# Altium PCB Flight Controller.PcbDoc
Units mm, origin at the board's own origin, x right, y up, seen from the top; angles counter-clockwise.
Board outline 55 x 55 mm, 4 copper layers (Top Layer, GND, PWR, Bottom Layer), stack 1.569 mm thick; 67 components, 56 nets, 288 pads, 159 vias.
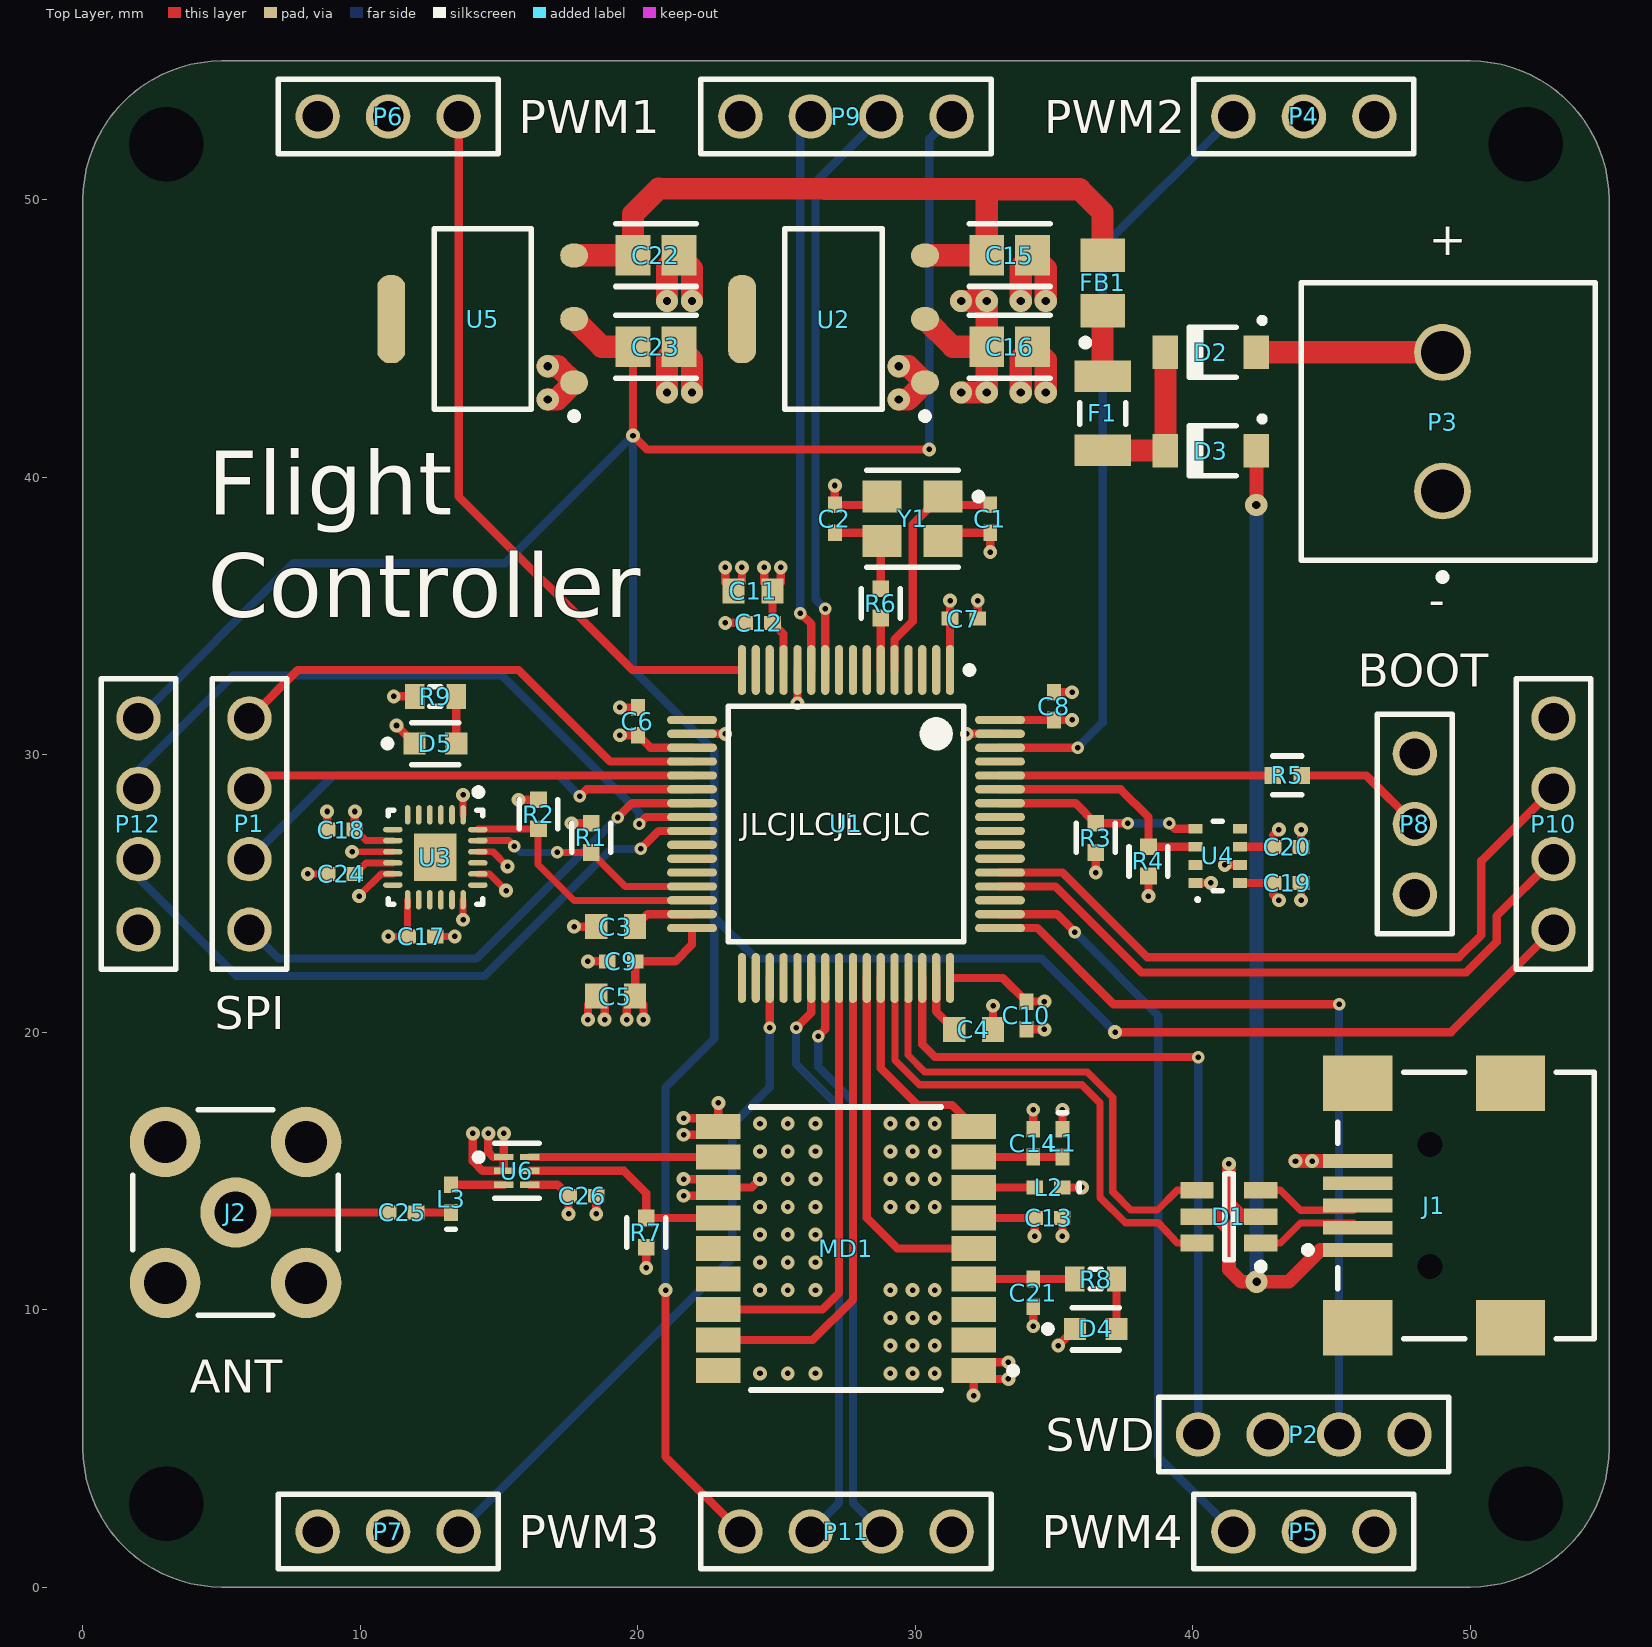
[diagram p0: Top Layer view]
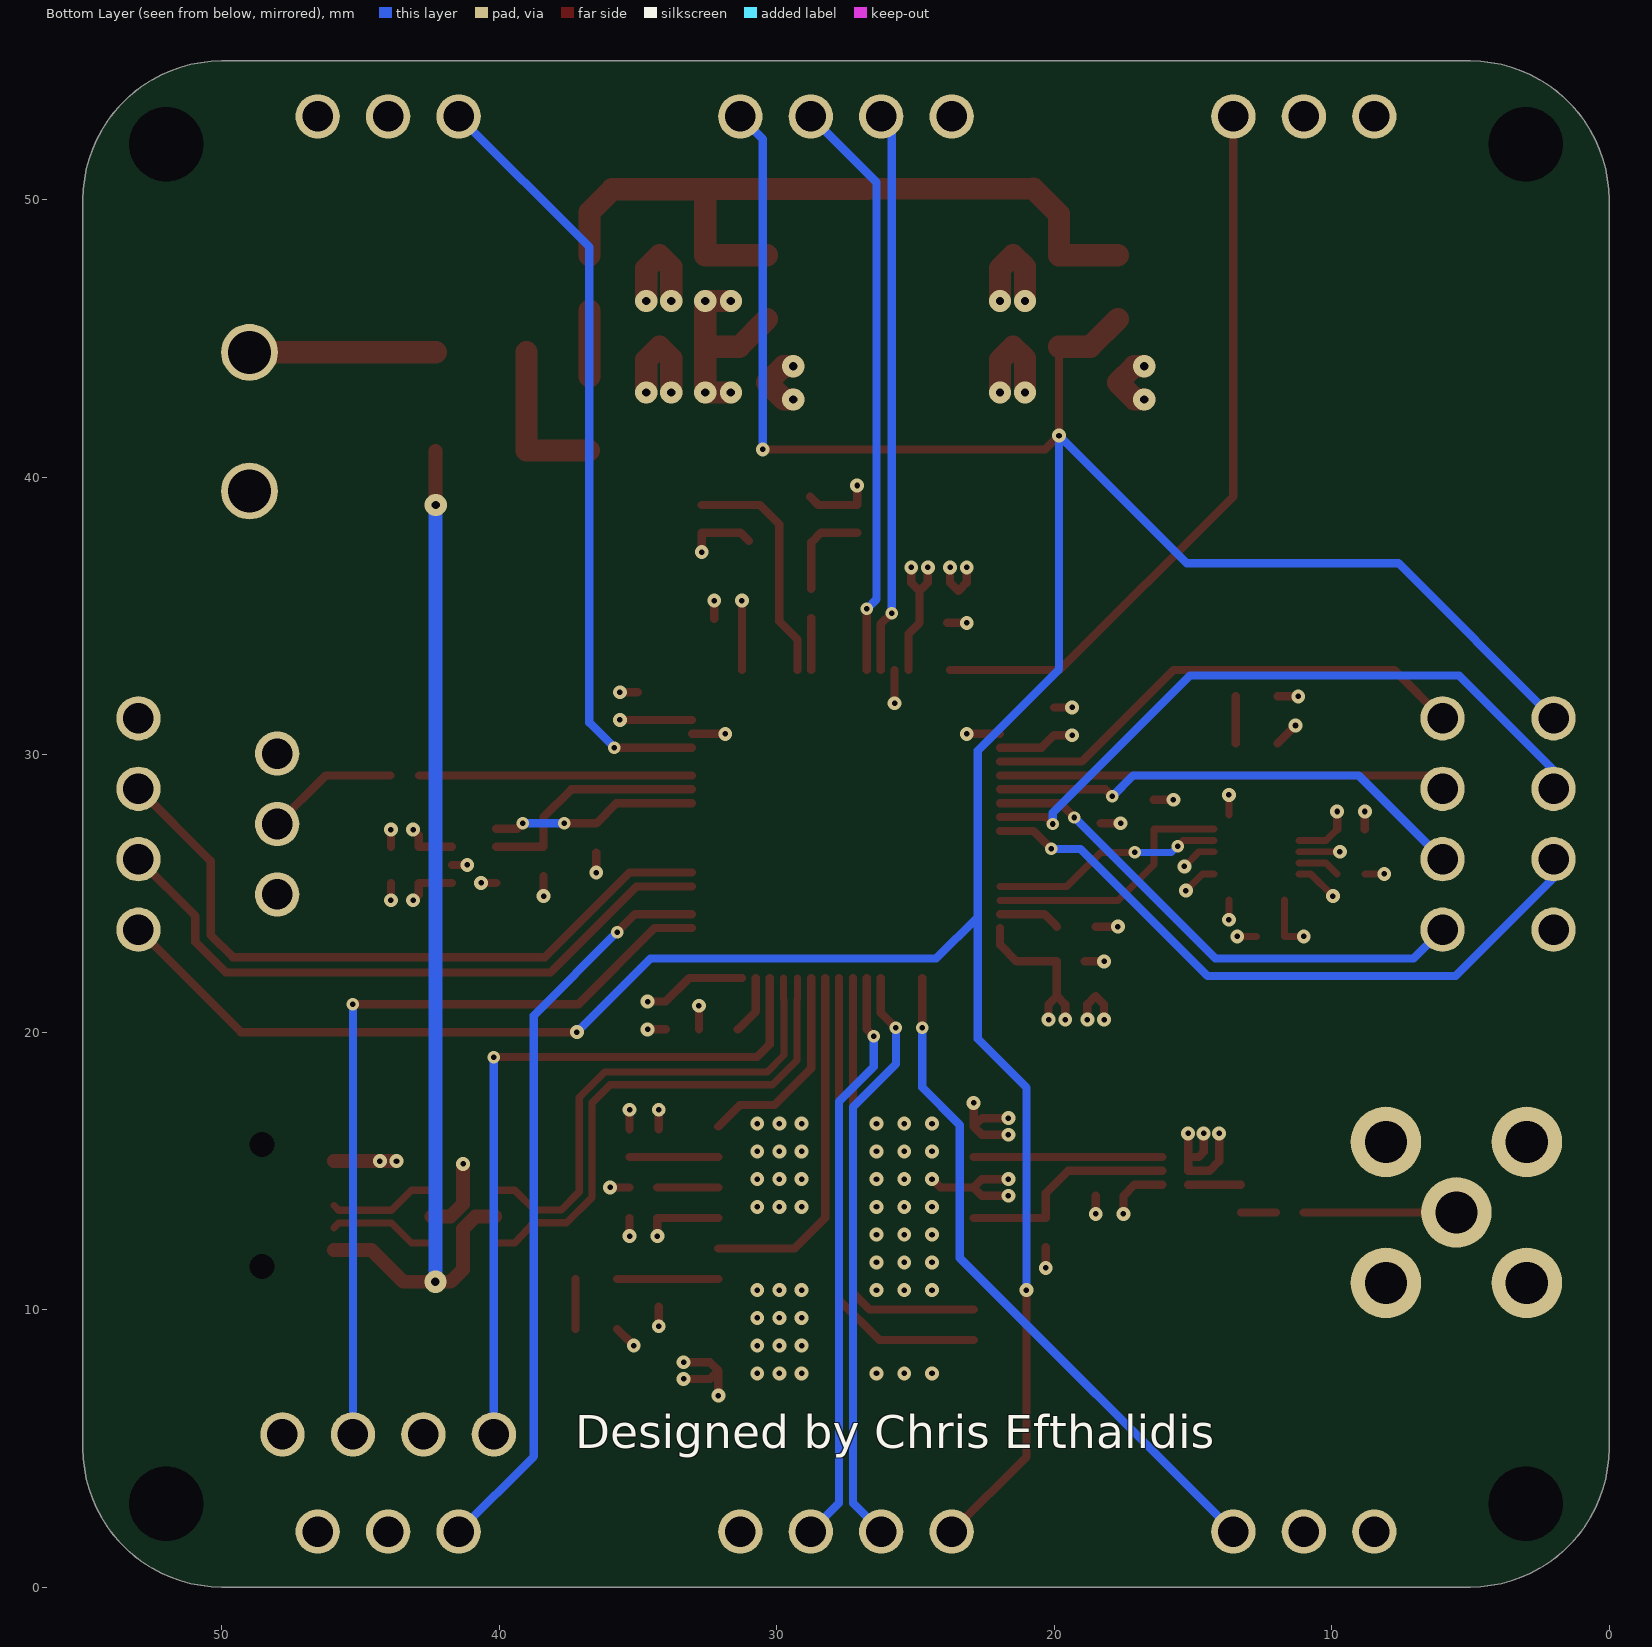
[diagram p1: Bottom Layer view, seen from below]
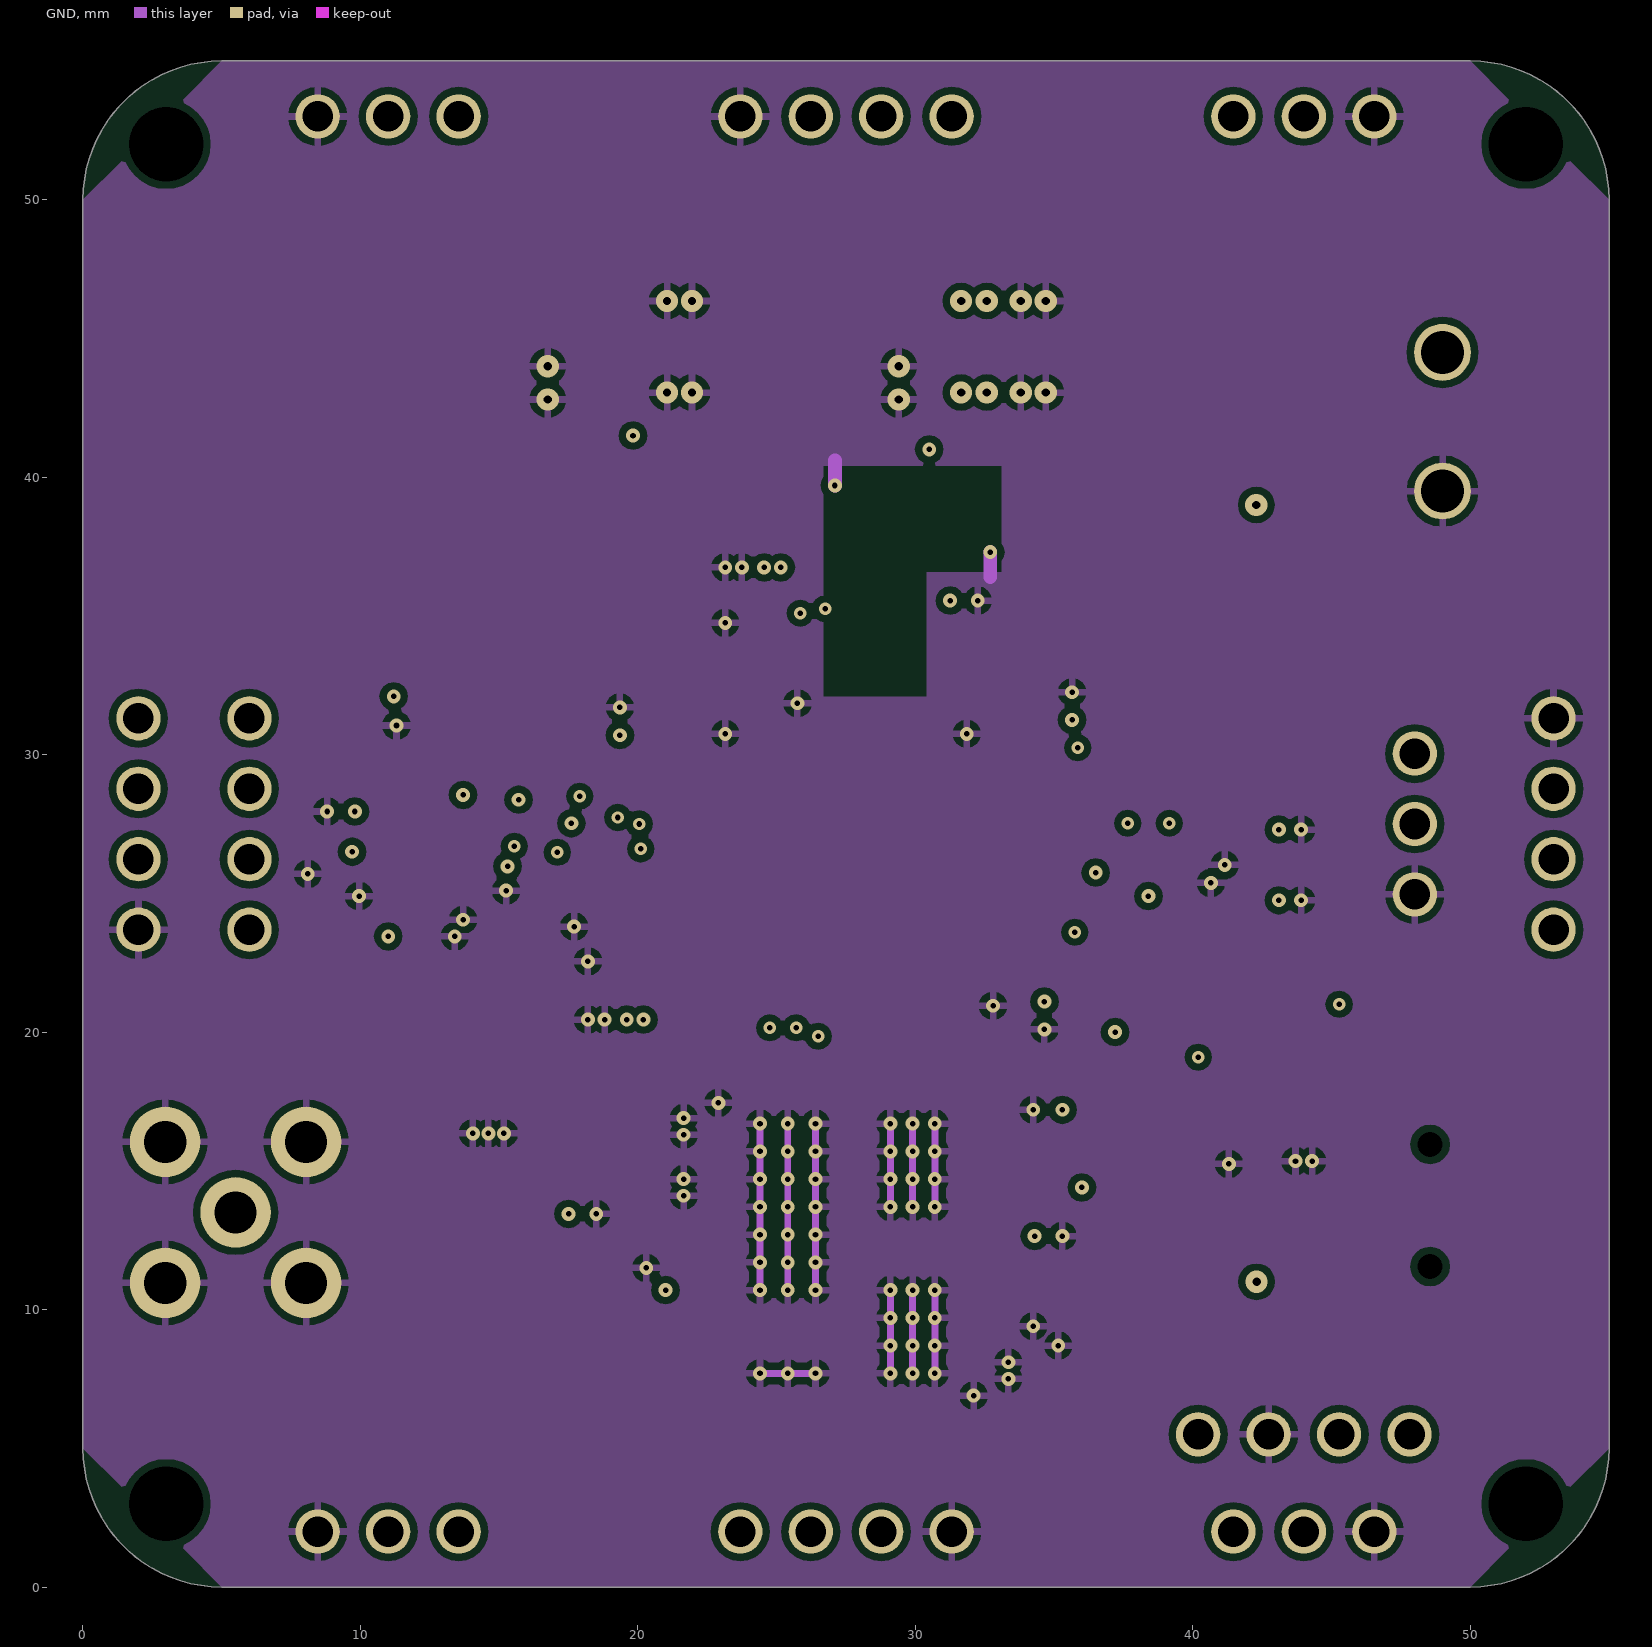
[diagram p2: GND]
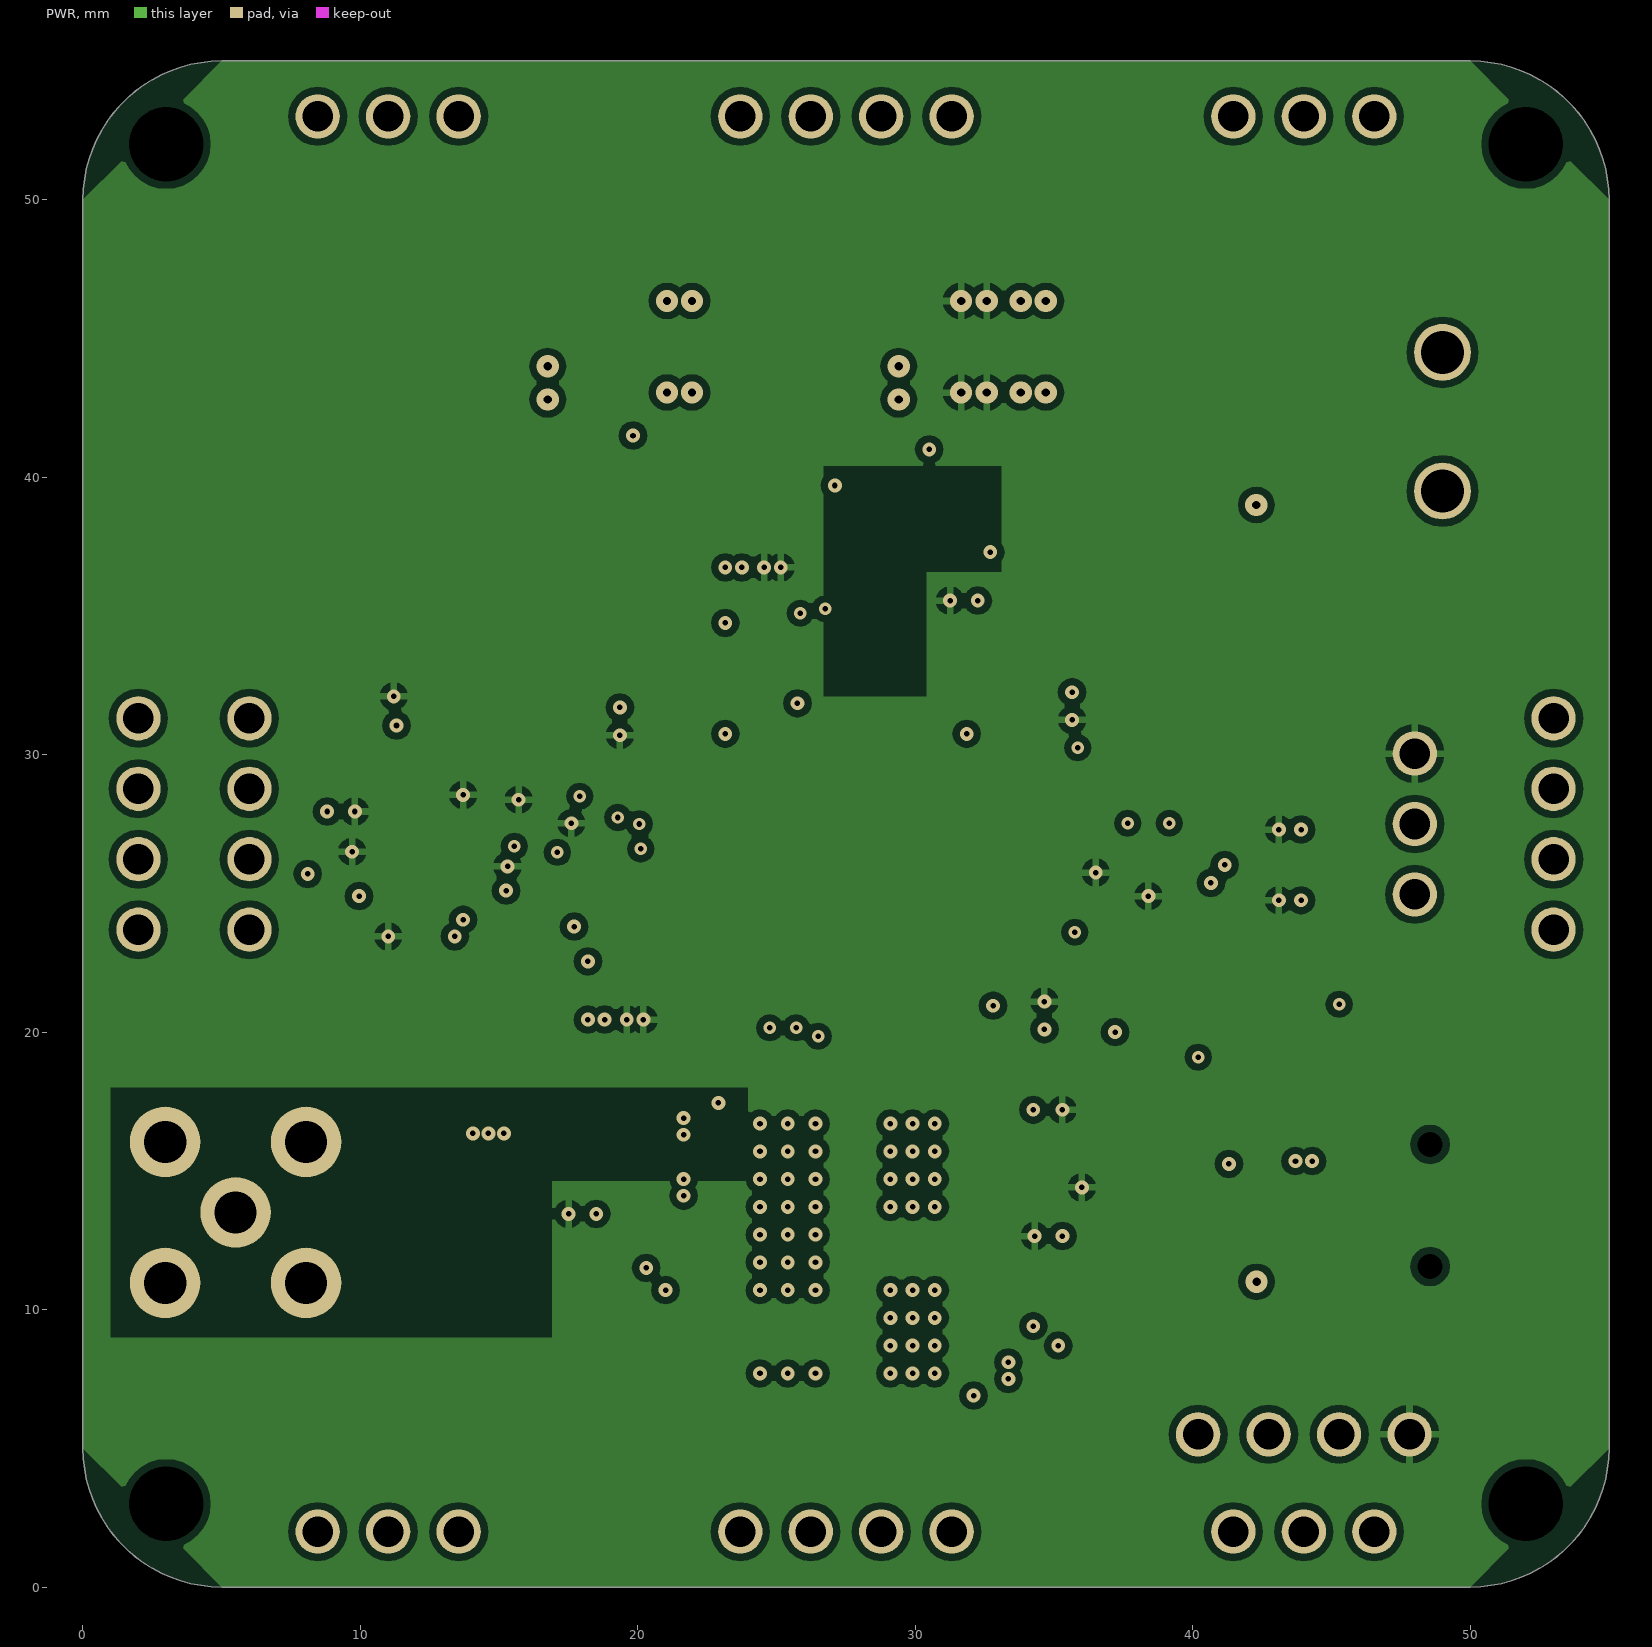
[diagram p3: PWR]

## Layer stack, top to bottom
Top Solder: solder mask 0.01, SM-001, Dk 3.8
Top Layer: signal copper 0.035
Dielectric 1: prepreg 0.2, PP-017, Dk 4.6
GND: signal copper 0.017
Dielectric 3: core 1.065, Core-039, Dk 4.8
PWR: signal copper 0.017
Dielectric 2: prepreg 0.2, PP-017, Dk 4.6
Bottom Layer: signal copper 0.035
Bottom Solder: solder mask 0.01, SM-001, Dk 3.8

## Board outline
0,5 0,50 cw(c5,50) 5,55 50,55 cw(c50,50) 55,50 55,5 cw(c50,5) 50,0 5,0 cw(c5,5)

## Design rules (kind name [scope] priority, off if disabled: settings)
Clearance [All] p1: gap=0.254 ignorepadtopadclearanceinfootprint=FALSE except(0: Arc-Hole Track-Hole; 0.1: Arc-Arc Arc-Track Track-Track; 0.127: SMDPad-SMDPad; 0.15: Arc-SMDPad Track-SMDPad; 0.2: THPad-THPad; 0.33: Arc-THPad Track-THPad)
DiffPairsRouting USB [InDifferentialPairClass('All Differential Pairs')] p1: maxlimit=0.203 minlimit=0.203 mostfreqgap=0.203 toplayer_minwidth=0.261 toplayer_maxwidth=0.261 toplayer_prefwidth=0.261 midlayer1_minwidth=0.261 midlayer1_maxwidth=0.261 midlayer1_prefwidth=0.261 midlayer2_minwidth=0.261 midlayer2_maxwidth=0.261 midlayer2_prefwidth=0.261 bottomlayer_minwidth=0.261 bottomlayer_maxwidth=0.261 bottomlayer_prefwidth=0.261 maxuncoupledlength=15
HoleSize [All] p1: absolutevalues=TRUE maxlimit=6.3 minlimit=0.2 maxpercent=80.000 minpercent=20.000
HoleToHoleClearance [All] p1: gap=0.1 allowstackedmicrovias=TRUE
MinimumSolderMaskSliver [All] p1: minsoldermaskwidth=0.1
PolygonConnect [All] p1: connectstyle=Relief reliefconductorwidth=0.254 reliefentries=4 polygonreliefangle="90 Angle" airgapwidth=0.254
RoutingVias [All] p1: holewidth=0.711 width=1.27 viastyle="Through Hole" minholewidth=0.2 minwidth=0.45 maxholewidth=0.711 maxwidth=1.27
SilkToSilkClearance [All] p1: silktosilkclearance=0.2
SilkToSolderMaskClearance [IsPad] p1: minsilkscreentomaskgap=0.1 clearancetoexposedcopper=TRUE
SolderMaskExpansion [All] p1: expansion=0.05
Width [All] p1: maxlimit=1 minlimit=0.1 preferedwidth=0.25 checkconnectedcopper=TRUE
24 further rules are at their usual default settings.

## Classes and differential pairs
differential pair USB: +USB_P -USB_N
differential pair USB_CONN: +USB_CONN_P -USB_CONN_N

## Components (designator, comment, footprint, x,y, rotation, side; value= is the part's Value field where it differs from the comment)
C1 "Cap Semi" 0402 32.7,38.5 r270 top value=12p
C2 "Cap Semi" 0402 27.1,38.5 r90 top value=12p
C3 "Cap Semi" 1608[0603] 19.2,23.8 r0 top value=2u2
C4 "Cap Semi" 1608[0603] 32.1,20.1 r180 top value=2u2
C5 "Cap Semi" 1608[0603] 19.2,21.3 r0 top value=4u7
C6 "Cap Semi" 0402 20,31.2 r270 top value=100n
C7 "Cap Semi" 0402 31.75,34.9 r180 top value=100n
C8 "Cap Semi" 0402 35,31.75 r270 top value=100n
C9 "Cap Semi" 0402 19.4,22.55 r0 top value=100n
C10 "Cap Semi" 0402 34,20.6 r90 top value=100n
C11 "Cap Semi" 1608[0603] 24.15,35.9 r0 top value=1u
C12 "Cap Semi" 0402 24.35,34.75 r0 top value=100n
C13 "Cap Semi" 0402 34.8,13.3 r0 top value=10n
C14 "Cap Semi" 0402 34.25,16 r270 top value=56p
C15 "10u" FP-CL21-IPC_B 33.4,48 r0 top
C16 "10u" FP-CL21-IPC_B 33.4,44.7 r0 top
C17 "Cap Semi" 0402 12.2,23.45 r180 top value=100n
C18 "Cap Semi" 0402 9.3,27.3 r0 top value=10n
C19 "Cap Semi" 0402 43.4,25.375 r0 top value=100n
C20 "Cap Semi" 0402 43.4,26.675 r0 top value=100n
C21 "Cap Semi" 0402 34.25,10.6 r270 top value=56p
C22 "10u" FP-CL21-IPC_B 20.65,48 r0 top
C23 "10u" FP-CL21-IPC_B 20.65,44.7 r0 top
C24 "Cap Semi" 0402 9.3,25.7 r0 top value=100n
C25 "Cap Semi" 0402 11.5,13.5 r0 top value=470p
C26 "Cap Semi" 0402 18,14.1 r0 top value=33n
D1 "USBLC6-2SC6" STM-SOT23-6L_V 41.3,13.35 r180 top
D2 "B5819W" MCC-SOD123_V 40.65,44.5 r180 top
D3 "B5819W" MCC-SOD123_V 40.65,40.95 r180 top
D4 "597-3901-831F" FP-597-MFG 36.5,9.3 r0 top
D5 "597-3901-831F" FP-597-MFG 12.7,30.4 r0 top
F1 "nSMD050-24V" FP-0466-MFG 36.75,42.3 r90 top value=0.075Ù
FB1 "GZ2012D601TF" SNLD-CHIP2-2012X105_V 36.75,47 r90 top
J1 "65100516121" WE-65100516121_V 48.7,13.75 r90 top
J2 "CONSMA001" CON-SMA 5.5,13.5 r90 top
L1 "Inductor" 0402-A 35.3,16 r270 top value=27n
L2 "Inductor" 0402-A 34.8,14.4 r180 top value=27n
L3 "Inductor" 0402-A 13.27,14 r90 top value=6n8
MD1 "TESEO-LIV3F" FP-LCC-18-MFG 27.5,12.2 r180 top
P1 "Header 4" 61300411121 6,27.5 r90 top
P2 "Header 4" 61300411121 44,5.5 r0 top
P3 "SCREW-5.0/5.08 2WAYS" SCREW-5.0-2WAYS_V 49,42 r90 top
P4 "Header 3" 61300311121 44,53 r0 top
P5 "Header 3" 61300311121 44,2 r0 top
P6 "Header 3" 61300311121 11,53 r180 top
P7 "Header 3" 61300311121 11,2 r180 top
P8 "Header 3" 61300311121 48,27.5 r270 top
P9 "Header 4" 61300411121 27.5,53 r0 top
P10 "Header 4" 61300411121 53,27.5 r270 top
P11 "Header 4" 61300411121 27.5,2 r180 top
P12 "Header 4" 61300411121 2,27.5 r90 top
R1 "10K" FP-CRCW0402-e3-MFG 18.318,27 r90 top
R2 "10K" FP-CRCW0402-e3-MFG 16.418,27.85 r90 top
R3 "10K" FP-CRCW0402-e3-MFG 36.5,27 r270 top
R4 "10K" FP-CRCW0402-e3-MFG 38.4,26.15 r270 top
R5 "10K" FP-CRCW0402-e3-MFG 43.4,29.25 r0 top
R6 "47" FP-CRCW0402-e3-MFG 28.75,35.45 r270 top
R7 "10K" FP-CRCW0402-e3-MFG 20.3,12.775 r270 top
R8 "Res3" J1-0603 36.5,11.1 r180 top value=33
R9 "Res3" J1-0603 12.7,32.1 r0 top value=330
U1 "STM32F405RGT6" STM-LQFP64_N 27.5,27.5 r270 top
U2 "AMS1117-3.3" FP-AMS1117-IPC_C 27.05,45.7 r180 top
U3 "MPU-9250" INSE-QFN-24-1700X1540TP_L 12.7,26.3 r270 top
U4 "SPL06-007" BOSC-LGA-8_V 40.9,26.35 r90 top
U5 "AMS1117-5.0" FP-AMS1117-IPC_C 14.405,45.7 r180 top
U6 "MAX2659ELT+T" FP-L611-2-MFG 15.635,15 r0 top
Y1 "X322516MLB4SI" FP-XRCJK-MFG 29.9,38.5 r180 top

## Footprints (in the part's own frame and the unit in brackets; to place one, negate y for a bottom-side part, rotate by r counter-clockwise, add the part's x,y. Pads: shape width x height; smd on the part's side, far side on the other; paste and mask are expansions set on the pad)
0402 [mm] "Chip Capacitor, Body 1.0x0.5mm, IPC High Density"
  rect 0.6x0.5 smd: 1(-0.5,0) 2(0.5,0)
  body extent -0.55,-0.3 0.55,0.3, height 1.3
0402-A [mm] "Chip Inductor, Body 1.0x0.5mm, IPC High Density"
  rect 0.6x0.5 smd: 1(-0.5,0) 2(0.5,0)
  silkscreen extent -1.1,-0.15 -1.1,0.15, body extent -0.55,-0.3 0.55,0.3, height 0.55
1608[0603] [mm] "Chip Capacitor, Body 1.6x0.8mm, IPC High Density"
  rect 0.8x0.9 smd: 1(-0.7,0) 2(0.7,0)
  body extent -0.87,-0.48 0.87,0.48, height 1.3
61300311121 [mm] "Pin Header, pitch 2.54 mm, THT, Vertical, single row, 3p"
  round 1.6 hole 1.1: 1(-2.54,0) 2(0,0) 3(2.54,0)
  silkscreen extent -3.96,-1.35 3.96,1.35, body extent -3.81,-1.27 3.81,1.27, height 8.57
61300411121 [mm] "Pin Header, pitch 2.54 mm, THT, Vertical, single row, 4p"
  round 1.6 hole 1.1: 1(-3.81,0) 2(-1.27,0) 3(1.27,0) 4(3.81,0)
  silkscreen extent -5.23,-1.35 5.23,1.35, body extent -5.08,-1.27 5.08,1.27, height 8.57
BOSC-LGA-8_V [mm] "LGA, 8-Leads, Body 2.5x2mm, Pitch 0.65mm"
  rect 0.35x0.5 smd: 1(-0.975,0.8) 2(-0.325,0.8) 3(0.325,0.8) 4(0.975,0.8) 5(0.975,-0.8) 6(0.325,-0.8) 7(-0.325,-0.8) 8(-0.975,-0.8)
  silkscreen extent -1.64,-0.16 1.25,0.79, body extent -1.25,-1 1.25,1, height 1
CON-SMA [mil] "Connector, SMA Female, 5-Lead, Thru-Hole, Straight, Body 7x7mm"
  round 100 hole 60: 1(0,0) 2(-100,100) 3(100,100) 4(100,-100) 5(-100,-100)
  silkscreen extent -146,-146 146,146
FP-0466-MFG [mil]
  rect 45x80 smd paste+0 mask+0: 1(-52.5,0) 2(52.5,0)
  silkscreen extent -15,-32 15,32, body extent -79,-44 79,44, height 10
FP-597-MFG [mm]
  rect 0.8x0.8 smd paste+0 mask+0: 1(-0.75,0) 2(0.75,0)
  silkscreen extent -1.85,-0.76 0.85,0.76, body extent -1.25,-0.56 1.25,0.56, height 0.25
FP-AMS1117-IPC_C [mm]
  oval 1.004x0.872 smd paste+0 mask+0: 1(-3.295,2.29)
  rrect100% 1.004x0.872 smd paste+0 mask+0: 2(-3.295,0) 3(-3.295,-2.29)
  rrect87% 1.004x3.182 smd paste+0 mask+0: 4(3.295,0)
  silkscreen extent -3.42,-3.25 1.75,3.62, body extent -3.9,-3.35 3.9,3.35, height 0.25
FP-CL21-IPC_B [mm]
  rect 1.255x1.456 smd paste+0 mask+0: 1(-0.826,0) 2(0.826,0)
  silkscreen extent -1.45,-1.13 1.45,1.13, body extent -1.7,-0.98 1.7,0.98, height 0.25
FP-CRCW0402-e3-MFG [mm]
  rect 0.6x0.6 smd paste+0 mask+0: 1(-0.525,0) 2(0.525,0)
  silkscreen extent -0.53,-0.7 0.53,0.7, body extent -0.92,-0.4 0.92,0.4, height 0.25
FP-L611-2-MFG [mm]
  rect 0.7x0.23 smd paste+0 mask+0: 1(-0.465,0.5) 2(-0.465,0) 3(-0.465,-0.5) 4(0.465,-0.5) 5(0.465,0) 6(0.465,0.5)
  silkscreen extent -1.5,-0.99 0.8,0.99, body extent -0.91,-0.87 0.91,0.87, height 0.25
FP-LCC-18-MFG [mm]
  rect 1.6x0.9 smd paste+0 mask+0: 1(-4.6,4.4) 2(-4.6,3.3) 3(-4.6,2.2) 4(-4.6,1.1) 5(-4.6,0) 6(-4.6,-1.1) 7(-4.6,-2.2) 8(-4.6,-3.3) 9(-4.6,-4.4) 10(4.6,-4.4) 11(4.6,-3.3) 12(4.6,-2.2) 13(4.6,-1.1) 14(4.6,0) 15(4.6,1.1) 16(4.6,2.2) 17(4.6,3.3) 18(4.6,4.4)
  silkscreen extent -6.15,-5.1 3.42,5.1, body extent -5.5,-5.2 5.5,5.2, height 0.25
FP-XRCJK-MFG [mm]
  rect 1.4x1.15 smd paste+0 mask+0: 1(-1.1,-0.8) 2(1.1,-0.8) 3(1.1,0.8) 4(-1.1,0.8)
  silkscreen extent -2.5,-1.75 1.65,1.75, body extent -1.9,-1.48 1.9,1.48, height 0.25
INSE-QFN-24-1700X1540TP_L [mm] "QFN, 24-Leads, Body 3.1x3.1mm, Pitch 0.40mm, Thermal Pad 1.54x1.70mm, IPC High Density"
  oval 0.7x0.2 smd: 1(-1.532,1) 2(-1.532,0.6) 3(-1.532,0.2) 4(-1.532,-0.2) 5(-1.532,-0.6) 6(-1.532,-1) 13(1.532,-1) 14(1.532,-0.6) 15(1.532,-0.2) 16(1.532,0.2) 17(1.532,0.6) 18(1.532,1)
  oval 0.2x0.7 smd: 7(-1,-1.532) 8(-0.6,-1.532) 9(-0.2,-1.532) 10(0.2,-1.532) 11(0.6,-1.532) 12(1,-1.532) 19(1,1.532) 20(0.6,1.532) 21(0.2,1.532) 22(-0.2,1.532) 23(-0.6,1.532) 24(-1,1.532)
  rect 1.7x1.54 smd: 25(0,0)
  silkscreen extent -2.47,-1.7 1.7,1.7, body extent -1.55,-1.55 1.55,1.55, height 1.05
J1-0603 [mm] "Chip Resistor, Body 1.6x0.8mm, IPC High Density"
  rect 0.7x0.9 smd: 1(-0.75,0) 2(0.75,0)
  silkscreen extent -0.2,-0.35 0.2,0.35, body extent -0.85,-0.48 0.85,0.48, height 0.9
MCC-SOD123_V [mil] "SOD123, 2-Leads, Body 2.7x1.6mm, Height 1.35mm"
  rect 35.98x47.99 smd: 1(-64.5,0) 2(64.5,0)
  silkscreen extent -36,-35 31,35, body extent -53,-31 53,31, height 53
SCREW-5.0-2WAYS_V [mm] "Socket, Screw Terminal Block, 2-Leads, Pitch 5mm, 90 Degree Angle, Through-Hole"
  round 2.05 hole 1.55: 1(-2.5,0) 2(2.5,0)
  silkscreen extent -5.72,-5.5 5,5.1, body extent -5,-5.5 5.02,5.1, height 18.2
SNLD-CHIP2-2012X105_V [mm] "SMD, 2-Leads, Body 2x1.25 mm, Height 1.05mm"
  rect 1.2x1.6 smd: 1(-1,0) 2(1,0)
  silkscreen extent -2.27,0.5 -2.03,0.75, body extent -1,-0.63 1,0.63, height 1.05
STM-LQFP64_N [mm] "Thin QFP, 64-Leads, Body 10x10mm, Pitch 0.5mm, IPC Medium Density"
  oval 1.8x0.3 smd: 1(-5.55,3.75) 2(-5.55,3.25) 3(-5.55,2.75) 4(-5.55,2.25) 5(-5.55,1.75) 6(-5.55,1.25) 7(-5.55,0.75) 8(-5.55,0.25) 9(-5.55,-0.25) 10(-5.55,-0.75) 11(-5.55,-1.25) 12(-5.55,-1.75) 13(-5.55,-2.25) 14(-5.55,-2.75) 15(-5.55,-3.25) 16(-5.55,-3.75) 33(5.55,-3.75) 34(5.55,-3.25) 35(5.55,-2.75) 36(5.55,-2.25) 37(5.55,-1.75) 38(5.55,-1.25) 39(5.55,-0.75) 40(5.55,-0.25) 41(5.55,0.25) 42(5.55,0.75) 43(5.55,1.25) 44(5.55,1.75) 45(5.55,2.25) 46(5.55,2.75) 47(5.55,3.25) 48(5.55,3.75)
  oval 0.3x1.8 smd: 17(-3.75,-5.55) 18(-3.25,-5.55) 19(-2.75,-5.55) 20(-2.25,-5.55) 21(-1.75,-5.55) 22(-1.25,-5.55) 23(-0.75,-5.55) 24(-0.25,-5.55) 25(0.25,-5.55) 26(0.75,-5.55) 27(1.25,-5.55) 28(1.75,-5.55) 29(2.25,-5.55) 30(2.75,-5.55) 31(3.25,-5.55) 32(3.75,-5.55) 49(3.75,5.55) 50(3.25,5.55) 51(2.75,5.55) 52(2.25,5.55) 53(1.75,5.55) 54(1.25,5.55) 55(0.75,5.55) 56(0.25,5.55) 57(-0.25,5.55) 58(-0.75,5.55) 59(-1.25,5.55) 60(-1.75,5.55) 61(-2.25,5.55) 62(-2.75,5.55) 63(-3.25,5.55) 64(-3.75,5.55)
  silkscreen extent -5.67,-4.25 4.25,4.58, body extent -5,-5 5,5, height 1.6
STM-SOT23-6L_V [mm] "SOT23, 6-Leads, Body 3.05x1.75mm, Pitch 0.95mm"
  rect 1.2x0.6 smd: 1(-1.15,0.95) 2(-1.15,0) 3(-1.15,-0.95) 4(1.15,-0.95) 5(1.15,0) 6(1.15,0.95)
  silkscreen extent -1.28,-1.55 0.15,1.92, body extent -1.6,-1.53 1.6,1.53, height 1.45
WE-65100516121_V [mm] "SMD, 5-Leads, Body 9.6x9.25mm, Pitch 0.8mm"
  rect 0.5x2.5 smd: 1(-1.6,2.75) 2(-0.8,2.75) 3(0,2.75) 4(0.8,2.75) 5(1.6,2.75)
  rect 2x2.5 smd: 6(-4.4,2.75) 7(4.4,2.75) 8(-4.4,-2.75) 9(4.4,-2.75)
  round 0.6 hole 0.9 unplated: MH1(-2.2,0.15) MH2(2.2,0.15)
  silkscreen extent -4.8,-5.77 4.8,4.68, body extent -4.8,-5.77 4.8,3.48, height 3.9

## Part data
C1 C2 C3 C4 C5 C6 C7 C8 C9 C10 C11 C12 C13 C14 C17 C18 C19 C20 C21 C24 C25 C26: "Capacitor (Semiconductor SIM Model)", LatestRevisionDate=29-May-2009, LatestRevisionNote="IPC-7351 Footprint Added.", PackageDescription="Chip Capacitor", PackageReference=C1206, Published=8-Jun-2000, Publisher="Altium Limited"
C15 C16 C22 C23: library part CMP-13271-002975-1, "CL21 Series 0805 10uF 25V ±10% Tolerance X5R Multilayer Ceramic Chip Capacitor", Capacitance=10uF, Case/Package=0805, Case Code (Metric)=2012, Dielectric=X5R, Max Operating Temperature=85°C, Min Operating Temperature=-55°C, Package Quantity=1, Tolerance=10%, Voltage Rating=25V, Case Code (Imperial)=0805, Depth=1.25mm, Height=1.25mm, Length=2mm, Mount="Surface Mount", Packaging="Tape and Reel", Radiation Hardening=No, Thickness=0.057inch, Width=0.049inch
D1: library part CMP-2000-05378-1, "Very low capacitance ESD protection, 3.5 pF, -40 to 125 degC, 6-Pin SOT23, RoHS, Tape and Reel", Capacitance Value=3.5pF, Clamping Voltage=17V, Leakage Current=0.15uA, Manufacturer=STMicroelectronics, Operating Temperature Classification=Automotive, Operating Temperature Max Deg. C=125C, Operating Temperature Min Deg. C=-40C, Operating Temp Range=-40Cto125C, Package / Case=SOT-23, Package Description="6-Pin Small Outline Transistor, Body 2.925 x 1.625 mm, Pitch 0.95 mm", Package Reference=SOT23-6L, Peak Pulse Current=5A, Reverse Breakdown Voltage=6V, Reverse Stand-off Voltage=5V, Test Current (It)=1mA, Clamping Voltage (Max)=17V, Configuration=Dual, Datasheet URL=http://www.st.com/st-web-ui/static/active/en/resource/technical/document/datasheet/CD00050750.pdf, Datasheet Version="Rev. 5, 10/2011", Direction Type=Uni-Directional, Leakage Current (Max)=0.15uA, Manufacturer URL=http://www.st.com/, Mounting=SurfaceMount, Mounting Style=SurfaceMount, Number of Elements=1, Packaging=TapeandReel, Pin Count=6, Polarity=Uni-Directional, Product Depth (mm)=1.75mm, Product Height (mm)=1.3mm, Product Length (mm)=3.05mm, Rad Hardened=No, Suppressor Type=DiodeArrays, Working Voltage=5V, Working Voltage (Max)=5V
D2 D3: library part CMP-2100-03587-1, "Schottky Barrier Rectifier, 1 A, 40 Vrm, -65 to 125 degC, 2-Pin SOD123, RoHS, Tape and Reel", Manufacturer="Micro Commercial Components", Package Description="2-Pin Small Outline Diode, Body 2.7 x 1.6 mm, Height 1.35 mm", Package Reference=SOD123, Datasheet URL=http://www.mccsemi.com/up_pdf/B5817W-B5819W(SOD-123).pdf, Datasheet Version="Rev. B, 01/2013", Manufacturer URL=http://www.mccsemi.com/, Package URL=http://www.mccsemi.com/up_pdf/1N4448W(SOD-123).pdf
D4 D5: library part CMP-15384-000003-1, "LED COOL WHITE 2SMD", Colour=White, Forward Current=10mA, Forward Voltage=3.4V, Manufacturer=Dialight, Package=597, Power Dissipation=70mW, Reverse Voltage=5V, Temperature="-20°C to +80°C", Temperature Range High=+80°C, Temperature Range Low=-20°C, Automotive=No, Category=Diode, ComponentLink2Description=Datasheet, ComponentLink2URL=http://www.dialightsignalsandcomponents.com/Assets/Drawings/2D_Drawings_DrawingDetailedSpec/C17584.PDF, Device Class L1=Optoelectronics, Device Class L2=LEDs, Device Class L3=unset, Digikey Description="LED COOL WHITE 2SMD", Height=0.026inch, Lead Free=Yes, Led Orientation="Top View", Luminous Intensity=112-240mcd, Manufacturer Part Number=597-3901-831F, Mouser Description="Standard LEDs - SMD White, 20mA", Octopart=https://octopart.com/597-3901-831f-dialight-10598902, RoHS=TRUE, Viewing Angle=130°
F1: library part CMP-08605-000058-1, "FUSE BOARD MNT 1A 63VAC/VDC 1206", Fuse Current=1A, Fuse Interrupt Ac Current=50A, Fuse Voltage Drop=79.97mV, Manufacturer="Littelfuse Inc", Manufacturer Part Number=0466001.NR, Max Fuse Ac Voltage=63V, Package=0466, Resistance=0.075Ù, Temperature="-55°C to +90°C", Temperature Range High=+90°C, Temperature Range Low=-55°C, Automotive=No, Category=Fuse, ComponentLink2Description=Datasheet, ComponentLink2URL=https://www.littelfuse.com/~/media/electronics/datasheets/fuses/littelfuse_fuse_466_datasheet.pdf.pdf, Device Class L1="Circuit Protection", Device Class L2=Fuses, Device Class L3=unset, Digikey Description="FUSE BOARD MNT 1A 63VAC/VDC 1206", Fuse Blow Speed=Fast, Fuse I2T=0.0423A2Sec, Fuse Interrupt Dc Current=50A, Height=0.66mm, Lead Free=Yes, Max Fuse Dc Voltage=63V, Mouser Description="Surface Mount Fuses 63V FA 1206 1A VFA Slimline", Octopart=https://octopart.com/0466001.nr-littelfuse-566005, RoHS=TRUE, Voltage Rating=63V
FB1: library part CMP-0712-00004-1, "Multilayer Chip Ferrite Bead - GZ Series, 600 +/- 25% Ohm, 100 MHz, 500mA, -55 to 125 degC, 2-Pin 2 x 1.25 x 1.05 mm, Tape and Reel", Manufacturer=Sunlord, Max. DC Resistance (Ohm)=0.3, Max. Rated Current (mA)=500, Operating Temperature Range="-55 to 125 degC", Z Test Frequency (MHz)=100, ComponentLink1Description="Manufacturer URL", ComponentLink1URL=http://www.sunlordinc.com/, ComponentLink2Description=Datasheet, ComponentLink2URL=http://www.sunlordinc.com/UploadFiles/PDF_Cat/20130503142421156.pdf, ComponentLink3Description="Package Specification", ComponentLink3URL=http://www.sunlordinc.com/ewebeditor/uploadfile/20120428161759144.pdf, DatasheetVersion=05/2013, Impedance (Ohm)="600 +/- 25%", Mounting Technology="Surface Mount", PackageDescription="2-Pin Chip, Body 2 x 1.25 mm, Height 1.05 mm", PackageReference=CHIP-2012-2, PackageVersion=08/2011, Packing="Tape and Reel", PartNumber=GZ2012D601TF
J1: library part CMP-2000-05576-1, "MINI USB 2.0 SMT Type B 5 Contacts, 30 V, -40 to 105 degC, RoHS, Tape and Reel", Manufacturer="Wuerth Elektronik", Package Description="5-Pin Surface Mount Device, Body 9.6 x 9.25 mm, Pitch 0.8 mm", Datasheet URL=https://datasheet.ciiva.com/4598/65100516121-83749-4598775.pdf, Datasheet Version="Rev. H, 02/2013", Manufacturer URL=https://www.we-online.com/, Mounting Technology=SurfaceMount, Package Reference=65100516121
J2: library part CMP-0168-00006-1, "Female PCB Mount Connector, Thru-Hole", DatasheetVersion="rev1.1, Jan-2008", PackageDescription="SMA Female PCB Mount Connector, Thru-Hole, 7 x 7 mm Body", PackageReference=CON-SMA, PackageVersion="rev1.1, Jan-2008"
MD1: library part CMP-12160-000003-1, "RF RCVR GNSS/GPS 1.575GHZ 18LCC", Ambient Temperature Range High=+85°C, Ambient Temperature Range Low=-40°C, Manufacturer=STMicroelectronics, Max Frequency=1575.42MHz, Max Supply Voltage=4.3V, Min Supply Voltage=2.1V, Package=LCC-18, Temperature="-40°C to +85°C", Automotive=No, Category=UNK, ComponentLink2Description=Datasheet, ComponentLink2URL=https://www.st.com/resource/en/datasheet/teseo-liv3f.pdf, Device Class L1="Integrated Circuits (ICs)", Device Class L2="RF Semiconductors and Devices", Device Class L3="RF Receivers", Digikey Description="RF RCVR GNSS/GPS 1.575GHZ 18LCC", Height=2.33mm, Interface=I2C,UART, Lead Free=Yes, Manufacturer Part Number=TESEO-LIV3F, Mouser Description="Rf Receiver, 1.57542Ghz, -40 To 85Deg C", Octopart=https://octopart.com/teseo-liv3f-stmicroelectronics-84762432, RoHS=TRUE, Sensitivity=-163dBm, Temperature Range High=+85°C, Temperature Range Low=-40°C
P1 P2 P9 P10 P11 P12: library part CMP-1502-01064-1, "THT Vertical Pin Header WR-PHD, Pitch 2.54 mm, Single Row, 4 pins", Contact Resistance=20mOhm, Manufacturer="Wurth Elektronik", Operating Temperature=-40to105degC, Package Reference=61300411121, Rated Current=3A, Withstanding Voltage=500VAC, Working Voltage=250VAC, Datasheet URL=https://katalog.we-online.de/em/datasheet/6130xx11121.pdf, Gender=Male, Manufacturer URL=http://www.we-online.de, Mounting Technology=THT, Orientation=Vertical, Packaging=Bag, Part Number=61300411121, Pin Number=4, Pitch=2.54mm, Publisher=WurthElektronik, Row Number=Single
P3: library part CMP-0617-00009-1, "Socket, Screw Terminal Block, 2 Way, 5.0 mm Pitch, 90 Degree Angle, Through-Hole", Contact Resistance="20 mOhm", Insulation Resistance="5000 MOhm / 1000 V", Manufacturer="No Vendor", Rated Current="25 A", Rated Voltage="300 V", Temperature Range="-40 to 105 degC", ComponentLink1Description=Datasheet, ComponentLink1URL="5mm screw terminal in SVN", Mounting Technology="Through Hole", PackageDescription="Socket, Screw Terminal Block, 2 Way, Pitch 5 mm, 90 Degree Angle, Through-Hole", PartNumber="SCREW-5.0/5.08 2WAYS", Poles=2
P4 P5 P6 P7 P8: library part CMP-1502-01062-1, "THT Vertical Pin Header WR-PHD, Pitch 2.54 mm, Single Row, 3 pins", Contact Resistance=20mOhm, Manufacturer="Wurth Elektronik", Operating Temperature=-40to105degC, Package Reference=61300311121, Rated Current=3A, Withstanding Voltage=500VAC, Working Voltage=250VAC, Datasheet URL=https://katalog.we-online.de/em/datasheet/6130xx11121.pdf, Gender=Male, Manufacturer URL=http://www.we-online.de, Mounting Technology=THT, Orientation=Vertical, Packaging=Bag, Part Number=61300311121, Pin Number=3, Pitch=2.54mm, Publisher=WurthElektronik, Row Number=Single
R1 R2 R3 R4 R5 R6 R7: library part CMP-2002-08135-2, "RES SMD 10K OHM 1% 1/16W 0402", Case/Package=0402, Case Code (Metric)=1005, Max Operating Temperature=155°C, Max Power Dissipation=63mW, Min Operating Temperature=-55°C, Package Quantity=10, Resistance=10kR, Temperature Coefficient=100ppm/°C, Tolerance=1%, Voltage Rating=50V, Case Code (Imperial)=0402, Composition="Thick Film", Contact Plating=Tin, Depth=0.5mm, Features="Automotive AEC-Q200", Height=0.35mm, Lead Free="Lead Free", Length=1mm, Military Standard=Not, Mount="Surface Mount", Number of Pins=2, Number of Terminations=2, Packaging="Tape and Reel", Power Rating=63mW, Radiation Hardening=No, Termination=SMD/SMT, Voltage Rating (DC)=50V, Weight=2.3E-05oz, Width=0.02inch
R8 R9: "Resistor", LatestRevisionDate=29-May-2009, LatestRevisionNote="IPC-7351 Footprint Added.", PackageDescription="Chip Resistor", PackageReference=J1-0603, Published=8-Jun-2000, Publisher="Altium Limited"
U1: library part CMP-0243-00019-2, "ARM Cortex-M4 32-bit MCU+FPU, 210 DMIPS, 1024 kB Flash, 192 kB Internal RAM, 51 I/Os, 64-pin LQFP, -40 to 85 degC, Tray", I/Os (High Current)=51, Manufacturer=STMicroelectronics, Operating Frequency(F) (Processor speed) (MHz)=168, Supply Voltage(Vcc) max (V)=3.6, Supply Voltage(Vcc) min (V)=1.8, ComponentLink1Description="Manufacturer URL", ComponentLink1URL=http://www.st.com/web/en/home.html, ComponentLink2Description=Datasheet, ComponentLink2URL=http://www.st.com/st-web-ui/static/active/en/resource/technical/document/datasheet/DM00037051.pdf, ComponentLink3Description="Package Specification", ComponentLink3URL=http://www.st.com/st-web-ui/static/active/en/resource/technical/document/datasheet/DM00037051.pdf, Core="ARM Cortex-M4", D/A Converter=2x12-bit, DatasheetVersion="Rev. 4", FLASH Size (Prog) (kB)=1024, Internal RAM Size (kB)=192, Mounting Technology="Surface Mount", PackageDescription="64-Pin Low Profile Quad Flat Package, 10 x 10 mm Body, 0.5 mm Pitch", PackageReference=LQFP64, PackageVersion="Rev. 4, 06/2013", Packing=Tray, PartId=1, PartNumber=STM32F405RGT6
U2: library part CMP-209535-000001-1, "LDO Voltage Regulators 1A, 3.3V", Dropout Voltage=1.1V, Manufacturer="Advanced Monolithic Systems", Max Junction Temp=+125°C, Max Power Dissipation=1.2W, Max Supply Voltage=15V, Nominal Supply Current=5mA, Output Current=1A, Output Voltage=3.3V, Package=AMS1117, Temperature="-40°C to +125°C", Temperature Range Low=-40°C, Automotive=No, Category=IC, ComponentLink2Description=Datasheet, ComponentLink2URL=http://www.advanced-monolithic.com/pdf/ds1117.pdf, Device Class L1="Integrated Circuits (ICs)", Device Class L2="Power Management ICs", Device Class L3="Voltage Regulators - Linear", Height=1.8mm, Ipc Land Pattern Name=SOT229P700X180-4, Lead Free=Yes, Manufacturer Part Number=AMS1117-3.3, Number Of Outputs=1, Octopart=https://octopart.com/ams1117-3.3-advanced+monolithic+systems-25899300, Output Type=Fixed, RoHS=TRUE, Standoff Height=0.64mm, Temperature Range High=+125°C
U3: library part CMP-2100-03657-1, "9-axis MotionTracking device, 2.4 to 3,6 V, -40 to 85 degC, 24-Pin QFN, RoHS, Tape and Reel", Case/Package=QFN, Manufacturer=InvenSense, Max Operating Temperature=85degC, Max Supply Voltage=3.6V, Min Operating Temperature=-40degC, Min Supply Voltage=2.4V, Package Description="24-Pin Quad Flat No-lead Package, Body 3 x 3 mm, Pitch 0.4 mm", Package Quantity=1, Package Reference=QFN-24, Datasheet URL=http://datasheet.octopart.com/MPU-9250-InvenSense-datasheet-21859386.pdf, Datasheet Version="Rev. 1.0, 01/2014", Height=1mm, Length=3.1mm, Manufacturer URL=http://www.invensense.com/, Mount=SurfaceMount, PartId=1, RoHSCompliant=true, Width=3.1mm
U4: library part CMP-2000-05076-1, "Digital Pressure Sensor, 1.71 to 3.6 V, -40 to 85 degC, 8-Pin LGA, RoHS, Tape and Reel", Manufacturer="Bosch Sensortec", Datasheet URL=http://datasheet.octopart.com/BMP280-Bosch-datasheet-41546027.pdf, Datasheet Version="Rev. 1.14, 05/2015", Manufacturer URL=http://www.bosch-sensortec.com
U5: library part CMP-209535-000001-1, "LDO Voltage Regulators 1A, 5V", Dropout Voltage=1.1V, Manufacturer="Advanced Monolithic Systems", Manufacturer Part Number=AMS1117-3.3, Max Junction Temp=+125°C, Max Power Dissipation=1.2W, Max Supply Voltage=15V, Nominal Supply Current=5mA, Output Current=1A, Output Voltage=3.3V, Package=AMS1117, Temperature="-40°C to +125°C", Temperature Range Low=-40°C, Automotive=No, Category=IC, ComponentLink2Description=Datasheet, ComponentLink2URL=http://www.advanced-monolithic.com/pdf/ds1117.pdf, Device Class L1="Integrated Circuits (ICs)", Device Class L2="Power Management ICs", Device Class L3="Voltage Regulators - Linear", Height=1.8mm, Ipc Land Pattern Name=SOT229P700X180-4, Lead Free=Yes, Number Of Outputs=1, Octopart=https://octopart.com/ams1117-3.3-advanced+monolithic+systems-25899300, Output Type=Fixed, RoHS=TRUE, Standoff Height=0.64mm, Temperature Range High=+125°C
U6: library part CMP-05725-000003-1, "GPS Amp Single Low Noise 1.75GHz 3.6V 6-Pin UDFN", Contact Plating=Gold, Number of Pins=6
Y1: library part CMP-06057-000004-1, "Crystal Unit SMD 3225 Seam Sealing 20MHz 10ppm"
L1 L2 L3: Code_IEC=1005, Code_JEITA=0402, LatestRevisionDate=29-May-2009, LatestRevisionNote="IPC-7351 Footprint Added.", PackageDescription="Chip Inductor", PackageReference=0402-A, Published=8-Jun-2000, Publisher="Altium Limited"

## Free pads (board coordinates)
  round 2.6 hole 2.7 mask+0: 10(3,52) 11(3,3) 12(52,3) 13(52,52)

## Via types
v1: diameter 0.5, hole 0.2, Top Layer to Bottom Layer, 124 vias
v2: diameter 0.8, hole 0.3, Top Layer to Bottom Layer, 18 vias
v3: diameter 0.45, hole 0.2, Top Layer to Bottom Layer, 17 vias

## Nets (pads, with @x,y where several pads share a name; then routed paths per layer and width w, separated by ;. In a path a pad name is that pad's centre, name@x,y a point inside that pad or via, vN(x,y) a via of type N, cw(c..) or ccw(c..) an arc to the next point about the centre after c; other vN are vias at no path point)
5V: C23.1 P9.4 P10.4 P11.4 P12.4 U5.2 | length 127.1
  Top Layer w0.3: C23.1 v1(19.824,41.5) 20.324,41 v1(30.5,41) ; v1(20.996,10.7) 20.996,4.694 P11.4 ; v1(37.2,20) 49.31,20 P10.4
  Top Layer w0.8: U5.2 18.7,44.7 C23.1
  Bottom Layer w0.3: P12.4 7.59,36.9 15.224,36.9 v1(19.824,41.5) 19.824,33.076 22.75,30.15 22.75,24.15 ; v1(20.996,10.7) 20.996,17.996 22.75,19.75 22.75,24.15 ; v1(30.5,41) 30.5,52.19 P9.4 ; v1(37.2,20) 34.55,22.65 24.25,22.65 22.75,24.15
ADC_IN: P1.4 U1.20 | length 18
  Top Layer w0.3: P1.4 7.74,33.05 15.7,33.05 19,29.75 U1.20
BAR_SCL: R3.1 U1.58 U4.4 | length 7.4
  Top Layer w0.3: U1.58 35.775,28.25 R3.1 v3(37.65,27.525) ; v3(39.15,27.525) 39.35,27.325 U4.4
  Bottom Layer w0.3: v3(37.65,27.525) v3(39.15,27.525)
BAR_SDA: R4.1 U1.59 U4.3 | length 8.5
  Top Layer w0.3: U1.59 37.4,28.75 38.4,27.75 R4.1 U4.3
BAR_VDD: C5.2 C6.2 C7.2 C8.2 C9.2 C10.2 C11.2 C12.2 C13.1 C16.1 C17.2 C18.2 C19.1 C20.1 C26.1 L1.1 L2.1 MD1.6 P2.4 P8.1 R1.2 R2.2 R3.2 R4.2 R9.1 U1.1 U1.13 U1.19 U1.32 U1.48 U1.64 U2.2 U3.1 U3.8 U3.9 U3.13 U3.22 U4.6 U4.8 U6.4 | length 52.1
  Top Layer w0.25: v1(9.7,26.5) U3.9 ; C18.2 10.2,26.9 U3.8 ; v1(11,23.45) C17.2 U3.13 ; U3.1 v1(13.7,28.55) ; U3.22 14.773,26.5 v1(15.302,25.971)
  Top Layer w0.3: C18.2 v1(9.8,27.95) ; v1(11.2,32.1) R9.1 ; v1(15.7,28.375) R2.2 ; U6.4 17.1,14.5 C26.1 v1(17.5,13.45) ; v1(17.6,27.525) R1.2 ; v1(19.35,30.7) C6.2 20.45,30.25 U1.19 ; v1(19.6,20.45) 19.6,21 C5.2 ; v1(20.2,20.45) 20.2,21 C5.2 ; U1.32 21.95,23.15 21.35,22.55 C9.2 C5.2 ; v1(24.55,36.75) 24.55,36.2 C11.2 ; v1(25.15,36.75) 25.15,36.2 C11.2 ; U1.13 25.25,34.35 C12.2 C11.2 ; U1.48 33.15,21.95 C10.2 v1(34.65,21.1) ; U1.1 C7.2 v1(31.25,35.55) ; MD1.6 C13.1 v1(34.3,12.65) ; U1.64 C8.2 v1(35.65,31.25) ; L2.1 v1(36,14.4) ; L1.1 v1(35.3,17.2) ; v1(36.5,25.75) R3.2 ; v1(38.4,24.9) R4.2 ; U4.8 C19.1 42.9,24.95 v1(43.1,24.75) ; U4.6 C20.1 42.9,27.1 v1(43.1,27.3)
  Top Layer w0.8: U2.2 31.345,44.7 C16.1 v2(32.574,46.35) v2(31.65,46.35) ; v2(31.65,43.05) v2(32.574,43.05) C16.1
BOOT0: R5.1 U1.60 | length 9.8
  Top Layer w0.3: U1.60 R5.1
CE: P2.1 U1.46 | length 26.1
  Top Layer w0.3: U1.46 30.25,19.55 30.7,19.1 v3(40.19,19.1)
  Bottom Layer w0.3: P2.1 v3(40.19,19.1)
CSN: P2.3 U1.49 | length 28.9
  Top Layer w0.3: U1.49 34.4,23.75 37.15,21 v3(45.27,21)
  Bottom Layer w0.3: P2.3 v3(45.27,21)
GND: C1.2 C2.2 C3.1 C4.1 C5.1 C6.1 C7.1 C8.1 C9.1 C10.1 C11.1 C12.1 C13.2 C14.1 C15.2 C16.2 C17.1 C18.1 C19.2 C20.2 C21.2 C22.2 C23.2 C24.1 C26.2 D1.2 D4.1 D5.1 J1.5 J2.2 J2.3 J2.4 J2.5 MD1.1 MD1.10 MD1.12 P2.2 P3.1 P4.3 P5.3 P6.3 P7.3 P8.3 P9.1 P10.1 P11.1 P12.1 R7.2 U1.12 U1.18 U1.63 U2.1 U3.11 U3.18 U3.20 U4.1 U4.7 U5.1 U6.1 U6.2 Y1.2 Y1.4 | length 112.2
  Top Layer w0.25: v1(8.1,25.7) C24.1 ; v1(9.95,24.9) 10.75,25.7 U3.11 ; C17.1 v1(13.4,23.45) ; v1(13.7,24.05) U3.18 ; U3.20 14.65,25.7 v1(15.25,25.1)
  Top Layer w0.3: C18.1 v1(8.8,27.95) ; v1(11.3,31.05) D5.1 ; v1(14.05,16.35) 14.05,15.35 14.4,15 U6.2 U6.1 ; v1(14.61,16.35) 14.61,15.676 14.786,15.5 U6.1 ; v1(15.17,16.35) U6.1 ; v1(17.7,23.8) C3.1 ; v1(18.2,20.45) 18.2,21 C5.1 18.8,21 v1(18.8,20.45) ; v1(18.2,22.55) C9.1 ; v1(18.5,13.45) C26.2 ; v1(19.35,31.7) C6.1 ; v1(20.3,11.5) R7.2 ; v1(21.65,14.1) 22.6,14.1 MD1.12 ; v1(21.65,14.7) 22.6,14.7 MD1.12 ; v1(21.65,16.3) 22.6,16.3 MD1.10 ; v1(21.65,16.9) 22.6,16.9 MD1.10 ; U1.18 v1(23.15,30.75) ; v1(22.9,17.45) MD1.10 ; v1(23.15,34.75) C12.1 ; v1(23.15,36.75) 23.15,36.2 C11.1 23.75,36.2 v1(23.75,36.75) ; v1(24.4,14.7) 24.1,14.4 MD1.12 ; v1(25.75,31.85) U1.12 ; v1(27.1,39.7) C2.2 28.5,39 Y1.2 ; Y1.4 31.3,38 C1.2 v1(32.7,37.3) ; v1(31.85,30.75) U1.63 ; v1(32.1,6.9) MD1.1 ; C7.1 v1(32.25,35.55) ; C4.1 v1(32.8,20.95) ; v1(33.35,7.5) 32.4,7.5 MD1.1 ; v1(33.35,8.1) 32.4,8.1 MD1.1 ; C10.1 v1(34.65,20.1) ; v1(34.25,9.4) C21.2 ; C14.1 v1(34.25,17.2) ; C8.1 v1(35.65,32.25) ; v1(35.15,8.7) D4.1 ; v1(35.3,12.65) C13.2 ; U4.1 v1(40.65,25.375) ; v1(41.15,26.025) U4.7 ; v1(43.9,24.75) C19.2 ; C20.2 v1(43.9,27.3)
  Top Layer w0.5: v1(41.3,15.25) 41.3,13.8 41.75,13.35 D1.2 ; v1(43.7,15.35) v1(44.3,15.35) J1.5
  Top Layer w0.8: v2(16.75,42.8) 17.09,42.8 U5.1 17.11,44 v2(16.75,44) ; v2(21.05,43.05) 21.05,44.274 C23.2 21.95,44.226 v2(21.95,43.05) ; v2(21.05,46.35) 21.05,47.574 C22.2 21.95,47.526 v2(21.95,46.35) ; v2(29.4,42.8) 29.735,42.8 U2.1 29.755,44 v2(29.4,44) ; v2(33.8,43.05) 33.8,44.274 C16.2 34.7,44.226 v2(34.7,43.05) ; v2(33.8,46.35) 33.8,47.574 C15.2 34.7,47.526 v2(34.7,46.35)
  GND w0.25: v1(24.4,7.7) v1(25.4,7.7) v1(26.4,7.7) ; v1(24.4,10.7) v1(24.4,11.7) v1(24.4,12.7) v1(24.4,13.7) v1(24.4,14.7) v1(24.4,15.7) v1(24.4,16.7) ; v1(25.4,10.7) v1(25.4,11.7) v1(25.4,12.7) v1(25.4,13.7) v1(25.4,14.7) v1(25.4,15.7) v1(25.4,16.7) ; v1(26.4,10.7) v1(26.4,11.7) v1(26.4,12.7) v1(26.4,13.7) v1(26.4,14.7) v1(26.4,15.7) v1(26.4,16.7) ; v1(29.1,7.7) v1(29.1,8.7) v1(29.1,9.7) v1(29.1,10.7) ; v1(29.1,13.7) v1(29.1,14.7) v1(29.1,15.7) v1(29.1,16.7) ; v1(29.9,7.7) v1(29.9,8.7) v1(29.9,9.7) v1(29.9,10.7) ; v1(29.9,13.7) v1(29.9,14.7) v1(29.9,15.7) v1(29.9,16.7) ; v1(30.7,7.7) v1(30.7,8.7) v1(30.7,9.7) v1(30.7,10.7) ; v1(30.7,13.7) v1(30.7,14.7) v1(30.7,15.7) v1(30.7,16.7)
  GND w0.5: v1(27.1,39.7) 27.1,40.6 ; 32.7,36.4 v1(32.7,37.3)
GNSS_ANT_OFF: MD1.13 R7.1 U6.5 | length 8
  Top Layer w0.3: U6.5 19.5,15 20.3,14.2 R7.1 MD1.13
GNSS_RST: MD1.9 U1.43 | length 7.5
  Top Layer w0.3: U1.43 28.75,18.7 30.075,17.375 31.325,17.375 MD1.9
GNSS_SCL: MD1.17 U1.41 | length 17.1
  Top Layer w0.3: MD1.17 26.3,8.9 27.75,10.35 U1.41
GNSS_SDA: MD1.16 U1.40 | length 15.9
  Top Layer w0.3: MD1.16 26.65,10 27.25,10.6 U1.40
GNSS_VCC: C14.2 L1.2 MD1.8 | length 3.2
  Top Layer w0.3: MD1.8 C14.2 L1.2
GNSS_VCCIO: L2.2 MD1.7 | length 2.2
  Top Layer w0.3: MD1.7 L2.2
GNSS_WAKEUP: MD1.5 U1.42 | length 13
  Top Layer w0.3: U1.42 28.25,13.3 29.35,12.2 MD1.5
IMU_SCL: R1.1 U1.29 U3.23 | length 8.4
  Top Layer w0.25: U3.23 15.35,26.9 v3(15.55,26.7) ; v3(17.1,26.475) R1.1 19.543,25.25 U1.29
  Bottom Layer w0.25: v3(15.55,26.7) 15.775,26.475 v3(17.1,26.475)
IMU_SDA: R2.1 U1.30 U3.24 | length 9.5
  Top Layer w0.25: U3.24@14.245,27.313 16.406,27.313 16.406,26.044 17.7,24.75 U1.30
NetC2_1: C2.1 R6.1 Y1.3 | length 3.5
  Top Layer w0.3: C2.1 28.4,38 28.75,37.65 R6.1
NetC3_2: C3.2 U1.31 | length 2.2
  Top Layer w0.3: C3.2 20.35,24.25 U1.31
NetC4_2: C4.2 U1.47 | length 2.1
  Top Layer w0.3: U1.47 30.75,20.75 C4.2
NetC15_1: C15.1 C22.1 FB1.2 U2.3 U5.3 | length 27.4
  Top Layer w0.8: U5.3@17.705,47.995 C22.1@19.819,47.995 ; C22.1 19.824,49.474 20.75,50.4 32.574,50.374 ; U2.3@30.35,47.995 C15.1@32.569,47.995 ; C15.1 32.574,50.374 ; FB1.2 36.75,49.55 35.926,50.374 32.574,50.374
NetC21_1: C21.1 MD1.4 R8.2 | length 3.6
  Top Layer w0.3: MD1.4 C21.1 R8.2
NetC24_2: C24.2 U3.10 | length 1.5
  Top Layer w0.25: C24.2 10.2,26.1 U3.10
NetC25_1: C25.1 J2.1 | length 5.5
  Top Layer w0.293: J2.1 C25.1
NetC25_2: C25.2 L3.1 | length 1.3
  Top Layer w0.293: C25.2 L3.1
NetD2_2: D2.2 D3.2 F1.1 | length 5.8
  Top Layer w0.8: F1.1@36.758,40.958 39.012,40.958 D2.2
NetD4_2: D4.2 R8.1 | length 1.8
  Top Layer w0.3: D4.2 R8.1
NetD5_2: D5.2 R9.2 | length 1.7
  Top Layer w0.3: D5.2 R9.2
NetF1_2: F1.2 FB1.1 | length 2.4
  Top Layer w0.8: F1.2 FB1.1
NetL3_2: L3.2 U6.3 | length 1.9
  Top Layer w0.293: L3.2 U6.3
NetP8_2: P8.2 R5.2 | length 4.8
  Top Layer w0.3: R5.2 46.25,29.25 P8.2
OSC_IN: C1.1 U1.5 Y1.1 | length 8.6
  Top Layer w0.3: U1.5 29.25,34.15 29.9,34.8 29.9,38.3 30.6,39 C1.1
OSC_OUT: R6.2 U1.6 | length 1.9
  Top Layer w0.3: U1.6 R6.2
PWM1: P4.1 U1.62 | length 27.9
  Top Layer w0.3: U1.62 v3(35.85,30.25)
  Bottom Layer w0.3: v3(35.85,30.25) 36.75,31.15 36.75,48.29 P4.1
PWM2: P5.1 U1.50 | length 26.9
  Top Layer w0.3: U1.50 35.1,24.25 v3(35.75,23.6)
  Bottom Layer w0.3: v3(35.75,23.6) 38.75,20.6 38.75,4.71 P5.1
PWM3: P6.1 U1.16 | length 26.5
  Top Layer w0.3: P6.1 13.54,39.31 19.8,33.05 U1.16
PWM4: P7.1 U1.35 | length 24.6
  Top Layer w0.3: v3(24.75,20.15) U1.35
  Bottom Layer w0.3: P7.1 23.4,11.86 23.4,16.65 24.75,18 v3(24.75,20.15)
RFIN: MD1.11 U6.6 | length 6.8
  Top Layer w0.293: U6.6 MD1.11
SPI_MISO: P1.2 U1.22 | length 17.6
  Top Layer w0.3: v3(17.9,28.5) 18.15,28.75 U1.22
  Bottom Layer w0.3: P1.2 9.02,29.25 17.15,29.25 v3(17.9,28.5)
SPI_MOSI: P1.1 U1.23 | length 18.7
  Top Layer w0.3: v3(19.271,27.734) 19.787,28.25 U1.23
  Bottom Layer w0.3: P1.1 7.04,22.65 14.187,22.65 v3(19.271,27.734)
SPI_SCK: P1.3 U1.21 | length 16.1
  Top Layer w0.3: P1.3 6.48,29.25 U1.21
US1_ECHO: P9.2 U1.11 | length 20.3
  Top Layer w0.3: v3(25.85,35.1) 26.25,34.7 U1.11
  Bottom Layer w0.3: v3(25.85,35.1) 25.85,52.62 P9.2
US1_TRIG: P9.3 U1.10 | length 21.1
  Top Layer w0.3: U1.10 v3(26.75,35.25)
  Bottom Layer w0.3: v3(26.75,35.25) 26.4,35.6 26.4,50.63 P9.3
US2_ECHO: P10.2 U1.53 | length 25.3
  Top Layer w0.3: U1.53 35.3,25.75 38.35,22.7 49.6,22.7 50.4,23.5 50.4,26.17 P10.2
US2_TRIG: P10.3 U1.52 | length 23.5
  Top Layer w0.3: U1.52 35.05,25.25 38.15,22.15 49.85,22.15 50.95,23.25 50.95,24.18 P10.3
US3_ECHO: P11.2 U1.39 | length 21
  Top Layer w0.3: v3(26.495,19.845) 26.75,20.1 U1.39
  Bottom Layer w0.3: v3(26.495,19.845) 26.495,18.755 27.75,17.5 27.75,3.02 P11.2
US3_TRIG: P11.3 U1.38 | length 21.2
  Top Layer w0.3: v3(25.7,20.15) 26.25,20.7 U1.38
  Bottom Layer w0.3: v3(25.7,20.15) 25.7,18.85 27.25,17.3 27.25,3.02 P11.3
US4_ECHO: P12.2 U1.25 | length 24.3
  Top Layer w0.3: v3(20.1,26.6) 20.75,27.25 U1.25
  Bottom Layer w0.3: P12.2 2,25.55 5.529,22.021 14.471,22.021 19.05,26.6 v3(20.1,26.6)
US4_TRIG: P12.3 U1.24 | length 24.6
  Top Layer w0.3: v3(20.05,27.5) 20.3,27.75 U1.24
  Bottom Layer w0.3: P12.3 2,29.45 5.4,32.85 15.1,32.85 20.05,27.9 v3(20.05,27.5)
USB_CONN_N: D1.1 J1.2 | length 3.9
  Top Layer w0.261: D1.1 43.16,12.4 43.878,13.118 45.782,13.118 J1.2
USB_CONN_P: D1.3 J1.3 | length 3.9
  Top Layer w0.261: D1.3 43.16,14.3 43.878,13.582 45.782,13.582 J1.3
USB_N: D1.6 U1.44 | length 18.6
  Top Layer w0.261: U1.44 29.25,21.172 29.268,21.154 29.268,18.982 30.15,18.1 36,18.1 36.65,17.45 36.65,14.05 37.574,13.126 38.75,13.126 39.44,12.4 D1.6
USB_P: D1.4 U1.45 | length 17.8
  Top Layer w0.261: U1.45 29.75,21.172 29.732,21.154 29.732,19.174 30.342,18.564 36.192,18.564 37.114,17.642 37.114,14.242 37.766,13.59 38.73,13.59 39.44,14.3 D1.4
VBAT: D2.1 P3.2 | length 6.7
  Top Layer w0.8: D2.1 P3.2
VUSB: D1.5 D3.1 J1.1 | length 38
  Top Layer w0.5: D1.5 40.85,13.35 41.3,12.9 41.3,11.45 41.75,11 v2(42.3,11) 43.45,11 44.6,12.15 J1.1 ; v2(42.288,39) D3.1
  Bottom Layer w0.5: v2(42.3,11) v2@42.3,39
pads on no net: J1.4 J1.6 J1.7 J1.8 J1.9 J1.MH1 J1.MH2 MD1.2 MD1.3 MD1.14 MD1.15 MD1.18 P4.2 P5.2 P6.2 P7.2 U1.2 U1.3 U1.4 U1.7 U1.8 U1.9 U1.14 U1.15 U1.17 U1.26 U1.27 U1.28 U1.33 U1.34 U1.36 U1.37 U1.51 U1.54 U1.55 U1.56 U1.57 U1.61 U2.4 U3.2 U3.3 U3.4 U3.5 U3.6 U3.7 U3.12 U3.14 U3.15 U3.16 U3.17 U3.19 U3.21 U3.25 U4.2 U4.5 U5.4

## Polygon pours and split planes (outlines as drawn)
BAR_VDD on PWR "BAR_VDD_L03_P004" (solid, pour order 4): 0,50 5,55 50,55 55,50 55,5 50,0 5,0 0,5
GND on GND "GND_L02_P014" (solid, pour order 14): 5,55 0,50 0,5 5,0 50,0 55,5 55,50 50,55

## Other copper
GND:
  pour cut-out: 26.7,36 26.7,32.1 30.4,32.1 30.4,36.6 33.1,36.6 33.1,40.4 26.7,40.4
  pour cut-out: 27.75,40.5
PWR:
  pour cut-out: 23.95,18 23.95,14.65 16.9,14.65 16.9,9 1,9 1,18
  pour cut-out: 26.7,36 26.7,32.1 30.4,32.1 30.4,36.6 33.1,36.6 33.1,40.4 26.7,40.4

## Silkscreen, mask and mechanical layers (free items; w line width, h text height)
Top Overlay:
  circle w0.2: c42.5,42.1 r0.1
  circle w0.2: c42.5,45.65 r0.1
  text "PWM1" at 15.7,52.4 h1.2
  text "PWM2" at 34.65,52.4 h1.2
  text "+" at 48.5,48 h1.2
  text "Flight" at 4.5,38.65 h2.3
  text "-" at 48.5,35 h1.2
  text "Controller" at 4.5,34.95 h2.3
  text "BOOT" at 45.95,32.45 h1.2
  text "JLCJLCJLCJLC" at 23.7,27.1 h0.8
  text "SPI" at 4.75,20.1 h1.2
  text "ANT" at 3.85,7 h1.2
  text "SWD" at 34.7,4.9 h1.2
  text "PWM3" at 15.7,1.4 h1.2
  text "PWM4" at 34.55,1.4 h1.2
Bottom Overlay:
  text "Designed by Chris Efthalidis" at 37.25,5 h1.2